# Altium PCB WirelessStepperMotorController.PcbDoc
Units mm, origin at the board's own origin, x right, y up, seen from the top; angles counter-clockwise.
Board outline 120 x 50 mm, 2 copper layers (Top Layer, Bottom Layer), stack 1.071 mm thick; 114 components, 82 nets, 373 pads, 223 vias.
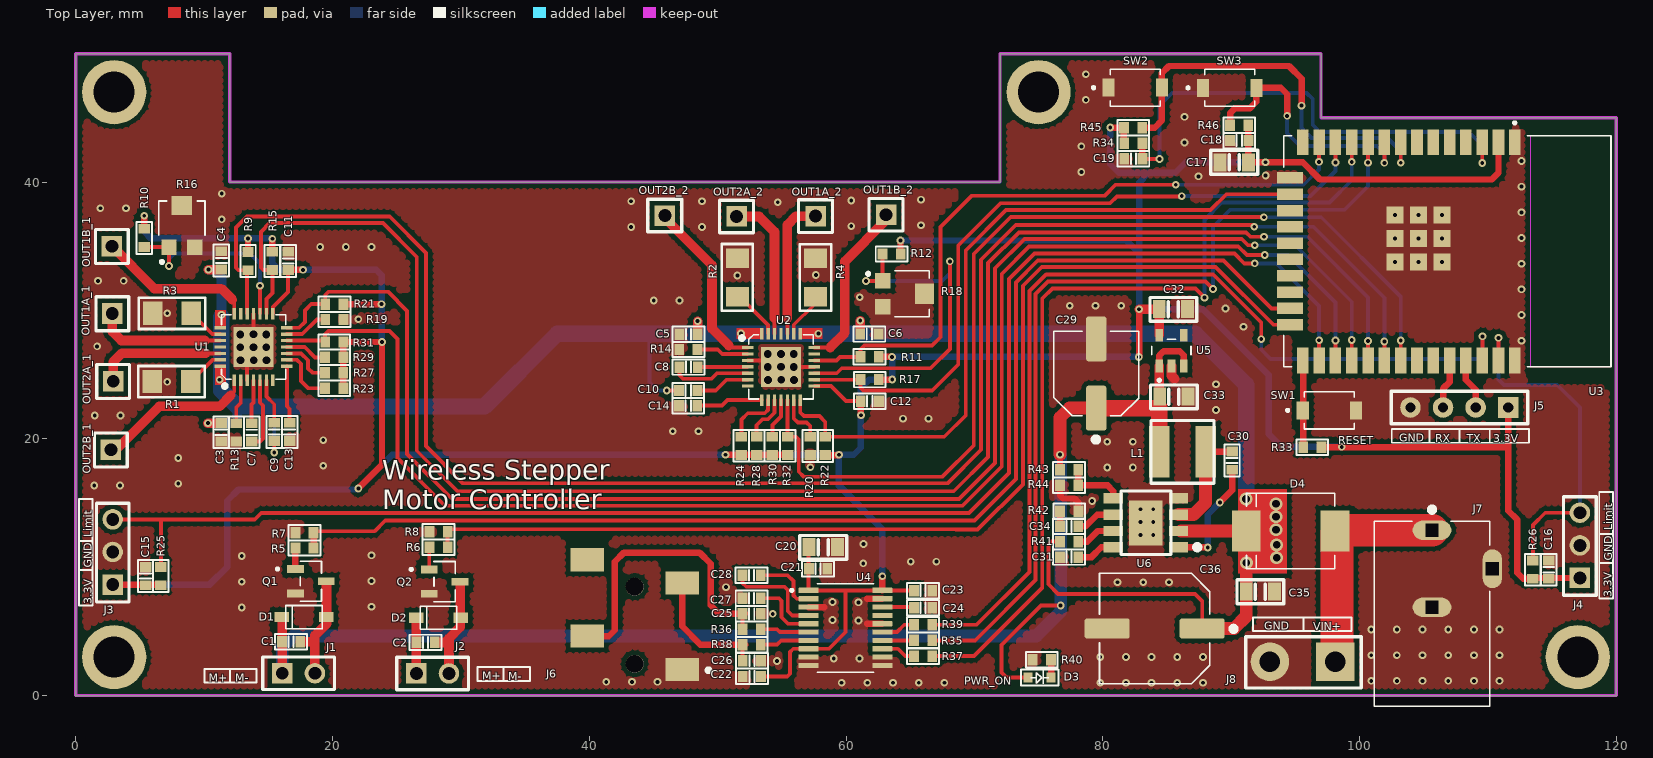
[diagram p0: Top Layer view]
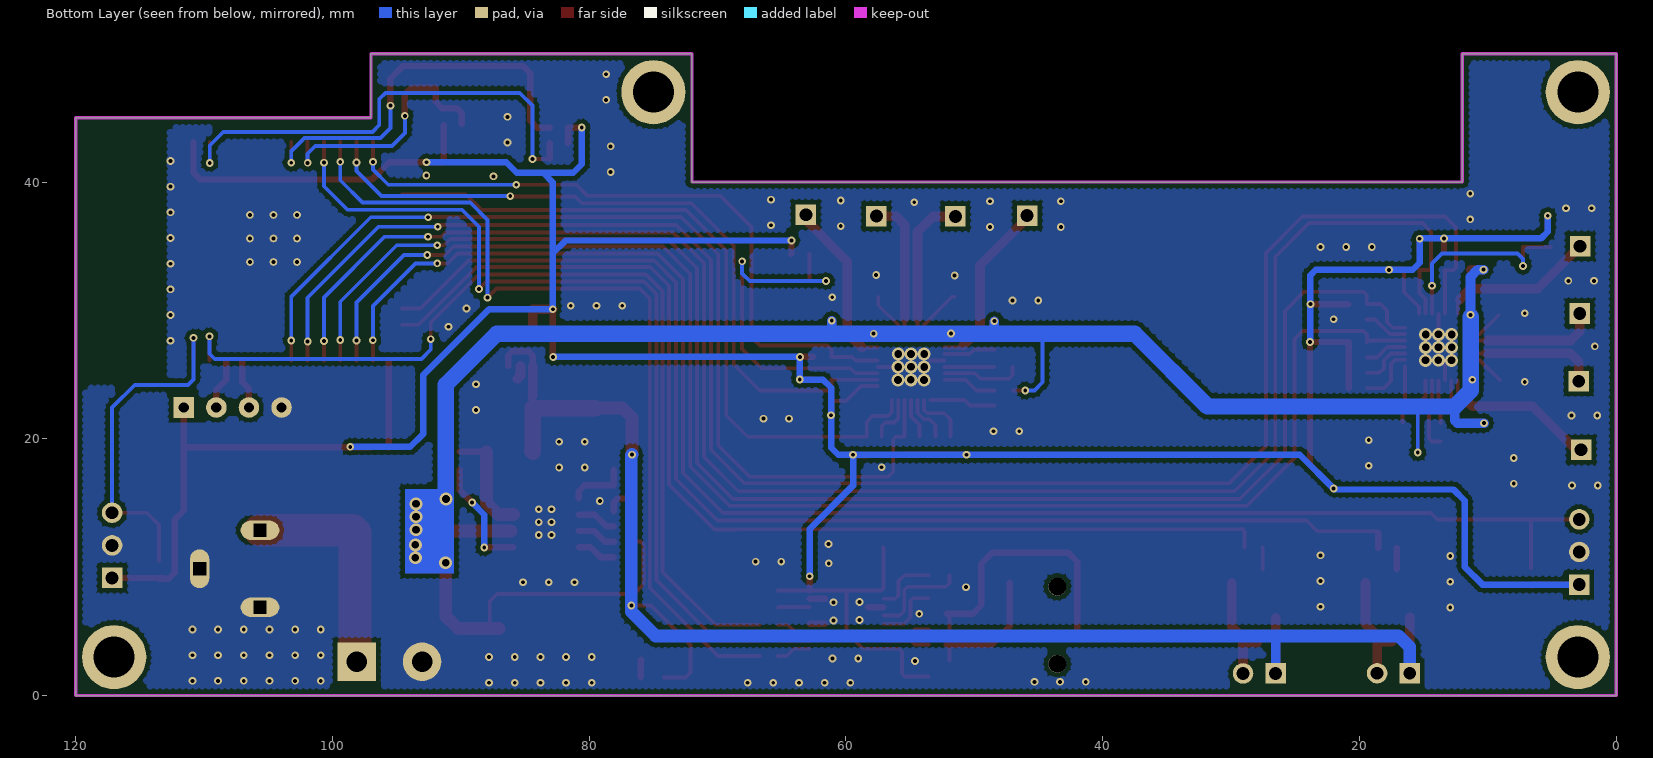
[diagram p1: Bottom Layer view, seen from below]

## Layer stack, top to bottom
Top Solder: solder mask 0.0102, Solder Resist, Dk 3.5
Top Layer: signal copper 0.0356
Dielectric 1: dielectric 1, FR-4, Dk 4.8
Bottom Layer: signal copper 0.0356
Bottom Solder: solder mask 0.0102, Solder Resist, Dk 3.5

## Board outline
0,0 0,50 12,50 12,40 72,40 72,50 97,50 97,45 120,45 120,0

## Design rules (kind name [scope] priority, off if disabled: settings)
Clearance [All] p1: gap=0.35 except(0.25: Arc-Arc Arc-Track Arc-SMDPad Arc-THPad Arc-Via Track-Track Track-SMDPad Track-THPad Track-Via SMDPad-SMDPad SMDPad-THPad SMDPad-Via THPad-THPad THPad-Via Via-Via)
Height [All] p1: minheight=0 maxheight=50 prefheight=12.7
HoleSize [All] p1: absolutevalues=TRUE maxlimit=10 minlimit=0.025 maxpercent=80.000 minpercent=20.000
HoleToHoleClearance [All] p1: gap=0 allowstackedmicrovias=TRUE
PolygonConnect PolygonConnect_1 [HasFootprint('RF_Shield_36903205S')] p1: connectstyle=Relief reliefconductorwidth=0.254 reliefentries=4 polygonreliefangle="90 Angle" airgapwidth=0.254
PolygonConnect [All] p2: connectstyle=Direct reliefconductorwidth=0.254 reliefentries=4 polygonreliefangle="90 Angle" airgapwidth=0.254
RoutingVias [All] p1: holewidth=0.3 width=0.6 viastyle="Through Hole" minholewidth=0.3 minwidth=0.5 maxholewidth=5 maxwidth=10
SolderMaskExpansion [All] p1: expansion=0.102
Width [All] p1: maxlimit=5 minlimit=0.2 preferedwidth=0.4
27 further rules are at their usual default settings.

## Components (designator, comment, footprint, x,y, rotation, side; value= is the part's Value field where it differs from the comment)
C1 "0.1uF" SMD_C(0603) 16.779,4.197 r0 top
C2 "0.1uF" SMD_C(0603) 27.26,4.14 r0 top
C3 "0.22uF" SMD_C(0603) 11.331,20.511 r90 top
C4 "0.22uF" SMD_C(0603) 11.355,33.89 r270 top
C5 "0.22uF" SMD_C(0603) 47.733,28.146 r0 top
C6 "0.22uF" SMD_C(0603) 61.816,28.161 r180 top
C7 "0.1uF" SMD_C(0603) 13.708,20.507 r270 top
C8 "0.1uF" SMD_C(0603) 47.743,25.589 r180 top
C9 "0.1uF" SMD_C(0603) 15.465,20.536 r270 top
C10 "0.1uF" SMD_C(0603) 47.714,23.764 r180 top
C11 "0.22uF" SMD_C(0603) 16.552,33.859 r270 top
C12 "0.22uF" SMD_C(0603) 61.853,22.92 r180 top
C13 "0.22uF" SMD_C(0603) 16.665,20.536 r90 top
C14 "0.22uF" SMD_C(0603) 47.711,22.585 r0 top
C15 "0.1uF" SMD_C(0603) 5.446,9.31 r90 top
C16 "0.1uF" SMD_C(0603) 114.733,9.805 r90 top
C17 "10uF" SMD_C(0805) 90.237,41.533 r0 top
C18 "0.1uF" SMD_C(0603) 90.628,43.232 r180 top
C19 "0.1uF" SMD_C(0603) 82.38,41.806 r180 top
C20 "10uF" SMD_C(0805) 58.227,11.559 r180 top
C21 "0.1uF" SMD_C(0603) 57.826,9.886 r0 top
C22 "0.1uF" SMD_C(0603) 52.677,1.49 r180 top
C23 "0.1uF" SMD_C(0603) 66.002,8.179 r0 top
C24 "0.1uF" SMD_C(0603) 66.006,6.852 r180 top
C25 "2.2nF" SMD_C(0603) 52.653,6.361 r0 top
C26 "2.2nF" SMD_C(0603) 52.674,2.721 r0 top
C27 "2.2uF" SMD_C(0603) 52.652,7.58 r180 top
C28 "2.2uF" SMD_C(0603) 52.65,9.368 r0 top
C29 "47uF/16V" CAPAE660X800N 79.489,25.085 r90 top
C30 "10nF" SMD_C(0603) 90.068,18.3 r90 top
C31 "0.1uF" SMD_C(0603) 77.375,10.792 r180 top
C32 "10uF" SMD_C(0805) 85.498,30.095 r180 top
C33 "10uF" SMD_C(0805) 85.538,23.28 r180 top
C34 "3.3nF" SMD_C(0603) 77.379,13.176 r180 top
C35 "10uF" SMD_C(0805) 92.278,8.096 r180 top
C36 "220uF/25V" CAPAE830X1000N 84.041,5.228 r180 top
D1 "1N5819HW-7-F" SOD-123 17.796,6.114 r0 top
D2 "1N5819HW-7-F" SOD-123 28.266,6.062 r0 top
D3 "SML-D12U1WT86" SMD_LED(0603) 75.074,1.417 r0 top
D4 "B540C-13-F" DO-214AB 94.628,12.824 r0 top
J1 "DC motor" Header-2.54m-2pin_1 16.09,1.738 r90 top
J2 "DC motor" Header-2.54m-2pin_1 26.538,1.726 r90 top
J3 "A1120LUA-T" Header-2.54m-3pin_1 2.887,8.647 r180 top
J4 "A1120LUA-T" Header-2.54m-3pin_1 117.156,9.162 r180 top
J5 "Debug" Header-2.54m-4pin 107.772,22.439 r270 top
J6 "SJ2-35813B-SMT-TR" CUI_SJ2-35813B-SMT-TR 43.54,5.731 r90 top locked
J7 "PJ-102A" CUI_PJ-102A 105.641,6.38 r270 top
J8 "2 Pin Connector" Header-2.54m-2pin_2 95.56,2.64 r270 top
L1 "10uH" IND_NRS5040 86.208,18.981 r180 top
OUT1A_1 "Terminal" Header-2.54m-1pin 2.857,29.76 r180 top
OUT1A_2 "Terminal" Header-2.54m-1pin 57.636,37.342 r90 top
OUT1B_1 "Terminal" Header-2.54m-1pin 2.824,35.001 r180 top
OUT1B_2 "Terminal" Header-2.54m-1pin 63.123,37.453 r90 top
OUT2A_1 "Terminal" Header-2.54m-1pin 2.924,24.486 r180 top
OUT2A_2 "Terminal" Header-2.54m-1pin 51.479,37.32 r90 top
OUT2B_1 "Terminal" Header-2.54m-1pin 2.742,19.142 r180 top
OUT2B_2 "Terminal" Header-2.54m-1pin 45.899,37.389 r90 top
Q1 "RQ5E040AJTCL" SC-96 18.318,8.906 r0 top
Q2 "RQ5E040AJTCL" SC-96 28.741,8.877 r0 top
R1 "0.11R" SMD_R(1206) 7.465,24.469 r180 top
R2 "0.11R" SMD_R(1206) 51.54,32.568 r90 top
R3 "0.11R" SMD_R(1206) 7.506,29.782 r180 top
R4 "0.11R" SMD_R(1206) 57.636,32.559 r90 top
R5 "150R" SMD_R(0603) 17.826,11.499 r180 top
R6 "150R" SMD_R(0603) 28.263,11.541 r180 top
R7 "10k" SMD_R(0603) 17.826,12.696 r180 top
R8 "10k" SMD_R(0603) 28.263,12.762 r180 top
R9 "10k" SMD_R(0603) 13.427,33.841 r90 top
R10 "10k" SMD_R(0603) 5.332,35.65 r90 top
R11 "10k" SMD_R(0603) 61.833,26.378 r0 top
R12 "10k" SMD_R(0603) 63.556,34.396 r0 top
R13 "10k" SMD_R(0603) 12.514,20.505 r90 top
R14 "10k" SMD_R(0603) 47.727,26.955 r0 top
R15 "10k" SMD_R(0603) 15.321,33.85 r90 top
R16 "10k" TRIM_TC33X-2-103E 8.275,36.721 r90 top
R17 "10k" SMD_R(0603) 61.846,24.617 r0 top
R18 "10k" TRIM_TC33X-2-103E 64.67,31.296 r0 top
R19 "10k" SMD_R(0603) 20.16,29.292 r180 top
R20 "10k" SMD_R(0603) 57.211,19.445 r90 top
R21 "10k" SMD_R(0603) 20.156,30.489 r0 top
R22 "10k" SMD_R(0603) 58.386,19.445 r270 top
R23 "10k" SMD_R(0603) 20.144,23.933 r0 top
R24 "10k" SMD_R(0603) 51.854,19.458 r270 top
R25 "10k" SMD_R(0603) 6.641,9.31 r90 top
R26 "10k" SMD_R(0603) 113.5,9.805 r90 top
R27 "10k" SMD_R(0603) 20.139,25.151 r0 top
R28 "10k" SMD_R(0603) 53.038,19.459 r270 top
R29 "10k" SMD_R(0603) 20.142,26.346 r0 top
R30 "10k" SMD_R(0603) 54.263,19.458 r270 top
R31 "10k" SMD_R(0603) 20.145,27.538 r0 top
R32 "10k" SMD_R(0603) 55.45,19.454 r270 top
R33 "10k" SMD_R(0603) 96.316,19.354 r0 top
R34 "10k" SMD_R(0603) 82.376,43.025 r0 top
R35 "22R" SMD_R(0603) 66.007,4.296 r180 top
R36 "470R" SMD_R(0603) 52.655,5.166 r180 top
R37 "22R" SMD_R(0603) 66.007,3.071 r180 top
R38 "470R" SMD_R(0603) 52.657,3.967 r180 top
R39 "22R" SMD_R(0603) 66.007,5.521 r180 top
R40 "470R" SMD_R(0603) 75.247,2.805 r0 top
R41 "100k" SMD_R(0603) 77.377,11.989 r180 top
R42 "13k" SMD_R(0603) 77.387,14.345 r0 top
R43 "57.6k" SMD_R(0603) 77.38,17.607 r0 top
R44 "13k" SMD_R(0603) 77.376,16.376 r180 top
R45 "10k" SMD_R(0603) 82.371,44.239 r180 top
R46 "10k" SMD_R(0603) 90.626,44.427 r0 top
SW1 "TL1015AF160QG" SW_TL1015AF160QG 97.646,22.22 r0 top
SW2 "TL1015AF160QG" SW_TL1015AF160QG 82.526,47.344 r0 top
SW3 "TL1015AF160QG" SW_TL1015AF160QG 89.887,47.338 r0 top
U1 "A4988SETTR-T" QFN28G_0.5-5X5MM 13.859,27.153 r90 top locked
U2 "A4988SETTR-T" QFN28G_0.5-5X5MM 54.935,25.604 r0 top locked
U3 "ESP32-WROOM-32D" MODULE_ESP32-WROOM-32D 106.831,34.605 r270 top locked
U4 "PCM5102APWR" TSSOP-20N 59.962,5.273 r0 top locked
U5 "AP2125K-3.3TRG1" SOT23-5 85.349,26.87 r0 top
U6 "AP3513EMPTR-G1" SOIC-8(EP) 83.362,13.458 r90 top

## Footprints (in the part's own frame and the unit in brackets; to place one, negate y for a bottom-side part, rotate by r counter-clockwise, add the part's x,y. Pads: shape width x height; smd on the part's side, far side on the other; paste and mask are expansions set on the pad)
CAPAE660X800N [mm] "CAPAE660X800N"
  rrect25% 3.51x1.58 smd: 1(-2.7,0) 2(2.7,0)
  silkscreen extent -5.34,-3.3 3.3,3.3, body extent -3.74,-3.42 3.66,3.38, height 6.1
CAPAE830X1000N [mm] "CAPAE660X800N"
  rrect25% 3.51x1.58 smd: 1(-3.7,0) 2(3.7,0)
  silkscreen extent -6.34,-4.3 4.3,4.3, body extent -4.45,-4.14 4.44,4.16, height 10.06
CUI_PJ-102A [mm]
  oval 1.508x3.016 hole 1 square: 1(-6.5,0) 2(-0.5,0)
  oval 3.016x1.508 hole 1 square: 3(-3.5,4.7)
  silkscreen extent -8.3,-4.5 7.2,4.5, body extent -7.23,-4.64 7.17,4.76, height 11.5
CUI_SJ2-35813B-SMT-TR [mm]
  rect 1.8x2.6 smd: 1(-3.7,-3.7) 2(3.05,-3.7) 3(-1.1,3.7) 10(4.85,3.7)
  round 1.4 hole 1.4 unplated: ""(-3.25,0) ""(2.75,0)
  silkscreen extent -3.9,-5.9 -3.6,-5.6, body extent -8.29,-4.5 5.71,4.5, height 5.11
DO-214AB [mm]
  rect 2.25x3.18 smd: A(3.455,0) K(-3.455,0)
  silkscreen extent -3.44,-2.95 3.44,2.95, body extent -3.98,-2.96 3.96,2.94, height 2.5
Header-2.54m-1pin [mm]
  rect 1.6x1.6 hole 1: 1(0,0)
  silkscreen extent -1.27,-1.31 1.27,1.34
Header-2.54m-2pin_1 [mm]
  rect 1.6x1.6 hole 1: 1(0,0)
  round 1.6 hole 1: 2(0,-2.54)
  silkscreen extent -1.27,-4.06 1.27,1.52
Header-2.54m-2pin_2 [mm]
  rect 3x3 hole 1.6: 1(0,2.54)
  round 3 hole 1.6: 2(0,-2.54)
  silkscreen extent -1.95,-4.43 2.05,4.57
Header-2.54m-3pin_1 [mm]
  rect 1.6x1.6 hole 1: 1(0,0)
  round 1.6 hole 1: 2(0,-2.54) 3(0,-5.08)
  silkscreen extent -1.27,-6.33 1.27,1.35
Header-2.54m-4pin [mm]
  rect 1.6x1.6 hole 0.8: 1(0,3.81)
  round 1.6 hole 0.8: 2(0,1.27) 3(0,-1.27) 4(0,-3.81)
  silkscreen extent -1.27,-5.31 1.27,5.33
IND_NRS5040 [mm] "IND_NR6045T100M"
  rect 1.6x4 smd: 1(-1.8,0) 2(1.8,0)
  silkscreen extent -2.45,-2.45 2.45,2.45
MODULE_ESP32-WROOM-32D [mm] "MODULE_ESP32-WROOM-32D"
  rect 2x0.9 smd: 1(-8.5,5.26) 2(-8.5,3.99) 3(-8.5,2.72) 4(-8.5,1.45) 5(-8.5,0.18) 6(-8.5,-1.09) 7(-8.5,-2.36) 8(-8.5,-3.63) 9(-8.5,-4.9) 10(-8.5,-6.17) 11(-8.5,-7.44) 12(-8.5,-8.71) 13(-8.5,-9.98) 14(-8.5,-11.25) 25(8.5,-11.25) 26(8.5,-9.98) 27(8.5,-8.71) 28(8.5,-7.44) 29(8.5,-6.17) 30(8.5,-4.9) 31(8.5,-3.63) 32(8.5,-2.36) 33(8.5,-1.09) 34(8.5,0.18) 35(8.5,1.45) 36(8.5,2.72) 37(8.5,3.99) 38(8.5,5.26)
  rect 0.9x2 smd: 15(-5.715,-12.25) 16(-4.445,-12.25) 17(-3.175,-12.25) 18(-1.905,-12.25) 19(-0.635,-12.25) 20(0.635,-12.25) 21(1.905,-12.25) 22(3.175,-12.25) 23(4.445,-12.25) 24(5.715,-12.25)
  rect 1.33x1.33 smd: 39(-2.835,-0.405) 39(-2.835,-2.24) 39(-2.835,-4.075) 39(-1,-0.405) 39(-1,-2.24) 39(-1,-4.075) 39(0.835,-0.405) 39(0.835,-2.24) 39(0.835,-4.075)
  round 0.6 hole 0.3: 39(-2.835,-0.405) 39(-2.835,-2.24) 39(-2.835,-4.075) 39(-1,-0.405) 39(-1,-2.24) 39(-1,-4.075) 39(0.835,-0.405) 39(0.835,-2.24) 39(0.835,-4.075)
  Top Layer keep-out region: -9,6.45 9,6.45 9,12.75 -9,12.75
  silkscreen extent -10.1,-12.75 9,12.75, body extent -8.98,-12.75 9.02,12.75, height 3.25
QFN28G_0.5-5X5MM [mm]
  rect 0.9x0.254 smd: 1(-2.59,1.5) 2(-2.59,1) 3(-2.59,0.5) 4(-2.59,0) 5(-2.59,-0.5) 6(-2.59,-1) 7(-2.59,-1.5) 15(2.59,-1.5) 16(2.59,-1) 17(2.59,-0.5) 18(2.59,0) 19(2.59,0.5) 20(2.59,1) 21(2.59,1.5)
  rect 0.254x0.9 smd: 8(-1.5,-2.59) 9(-1,-2.59) 10(-0.5,-2.59) 11(0,-2.59) 12(0.5,-2.59) 13(1,-2.59) 14(1.5,-2.59) 22(1.5,2.59) 23(1,2.59) 24(0.5,2.59) 25(0,2.59) 26(-0.5,2.59) 27(-1,2.59) 28(-1.5,2.59)
  rect 3.1x3.1 smd paste-3: 29(0,0)
  silkscreen extent -3.19,-2.5 2.5,2.5
SC-96 [mm]
  rect 1.31x0.6 smd: 1(-1.205,0.95) 2(-1.205,-0.95) 3(1.205,0)
  silkscreen extent -2.7,-1.57 0.83,1.57
SMD_C(0603) [mil]
  rect 30x35 smd mask+2: 1(-28,0) 2(28,0)
  silkscreen extent -49,-24 49,24, body extent -31,-16 31,16, height 31
SMD_C(0805) [mm]
  rect 1x1.4 smd: 1(-1.1,0) 2(1.1,0)
  silkscreen extent -1.82,-0.92 1.82,0.94, body extent -1.38,-0.58 1.32,0.61, height 0.6
SMD_LED(0603) [mm]
  rect 0.7x0.8 smd: 1(-0.9,0) 2(0.9,0)
  silkscreen extent -1.46,-0.62 1.46,0.62, body extent -0.98,-0.34 0.98,0.34, height 0.6
SMD_R(0603) [mil]
  rect 30x35 smd mask+2: 1(-28,0) 2(28,0)
  silkscreen extent -49,-24 49,24, body extent -35,-14 35,13, height 24
SMD_R(1206) [mm]
  rect 1.5x1.8 smd: 1(-1.5,0) 2(1.5,0)
  silkscreen extent -2.58,-1.2 2.6,1.23
SOD-123 [mm]
  rect 1.12x0.8 smd: A(1.73,0) K(-1.73,0)
  silkscreen extent -1.42,-0.9 1.42,0.9
SOIC-8(EP) [mm]
  rect 3.501x2.613 smd: 0(0,0)
  rect 0.802x1.505 smd: 1(-1.905,-2.54) 2(-0.635,-2.54) 3(0.635,-2.54) 4(1.905,-2.54) 5(1.905,2.54) 6(0.635,2.54) 7(-0.635,2.54) 8(-1.905,2.54)
  silkscreen extent -2.47,-4.19 2.47,1.95
SOT23-5 [mm]
  rect 0.59x1 smd: 1(-0.95,-1.2) 2(0,-1.2) 3(0.95,-1.2) 4(0.95,1.2) 5(-0.95,1.2)
  silkscreen extent -1.53,-2.41 1.53,0.87, body extent -1.45,-1.35 1.45,1.45, height 1.45
SW_TL1015AF160QG [mm]
  rect 0.95x1.4 smd: 1(-2.075,0) 2(2.075,0)
  silkscreen extent -3.35,-1.45 1.95,1.45, body extent -2.26,-1.44 2.24,1.46, height 2.1
TRIM_TC33X-2-103E [mm]
  rect 1.2x1.2 smd: 1(-1.8,1) 3(-1.8,-1)
  rect 1.5x1.6 smd: 2(1.45,0)
  silkscreen extent -3.07,-1.8 1.8,1.8, body extent -1.9,-1.5 1.9,1.5, height 1.1
TSSOP-20N [mm]
  rrect25% 1.57x0.41 smd: 1(-2.87,2.925) 2(-2.87,2.275) 3(-2.87,1.625) 4(-2.87,0.975) 5(-2.87,0.325) 6(-2.87,-0.325) 7(-2.87,-0.975) 8(-2.87,-1.625) 9(-2.87,-2.275) 10(-2.87,-2.925) 11(2.87,-2.925) 12(2.87,-2.275) 13(2.87,-1.625) 14(2.87,-0.975) 15(2.87,-0.325) 16(2.87,0.325) 17(2.87,0.975) 18(2.87,1.625) 19(2.87,2.275) 20(2.87,2.925)
  silkscreen extent -4.29,-3.45 2.2,3.45, body extent -3.21,-3.25 3.19,3.25, height 1.2

## Part data
C1 C2 C7 C8 C9 C10 C15 C16 C18 C19 C21 C22 C23 C24 C31: library part Cap, "0.1µF ±10% 25V"
C3 C4 C5 C6 C11 C12 C13 C14: library part Cap, "0.22µF ±10% 25V"
C17 C20 C32 C33 C35: library part Cap, "10µF ±10% 25V"
C25 C26: library part Cap, "2200pF ±10% 25V"
C27 C28: library part Cap, "2.2µF ±10% 25V"
C29: library part "Cap Pol1", "CAP ALUM 47UF 20% 16V SMD"
C30: library part Cap, "10nF ±10% 50V"
C34: library part Cap, "3300pF ±10% 25V"
C36: library part "Cap Pol1", "CAP ALUM 220UF 20% 25V SMD"
D1 D2: library part "Diode 10TQ035", "DIODE SCHOTTKY 40V 1A SOD123"
D3: library part LED1, "Typical RED GaAs LED"
D4: library part "Diode 10TQ035", "DIODE SCHOTTKY 40V 5A SMC"
J3 J4: library part 3PinConnector, "MAGNETIC SWITCH UNIPOLAR 3SIP"
J5: library part 4PinConnector, "4PinConnector"
J6: "AUDIO JACK, 3.5 MM, RT, 3 CONDUC"
J7: "CONN PWR JACK 2X5.5MM SOLDER"
J8: library part 2PinConnector
L1: library part Inductor, "FIXED IND 10UH 2.1A 72.8 MOHM"
Q1 Q2: library part MOSFET-N, "MOSFET N-CH 30V 4A TSMT3"
R1 R2 R3 R4: library part "Res Semi", "110 mOhms ±1% 0.25W"
R5 R6: library part "Res Semi", "150 Ohms ±1% 0.1W"
R7 R8 R9 R10 R11 R12 R13 R14 R15 R17 R19 R20 R21 R22 R23 R24 R25 R26 R27 R28 R29 R30 R31 R32 R33 R34 R41 R45 R46: library part "Res Semi", "10 kOhms ±1% 0.1W"
R16 R18: library part RPot, "Potentiometer"
R35 R37 R39: library part "Res Semi", "22 Ohms ±1% 0.1W"
R36 R38 R40: library part "Res Semi", "470 Ohms ±1% 0.1W"
R42: library part "Res Semi", "13 kOhms ±1% 0.1W"
R43: library part "Res Semi", "93.1kOhms ±1% 0.1W"
R44: library part "Res Semi", "13kOhms ±1% 0.1W"
SW1 SW2 SW3: library part SW-PB, "SWITCH TACTILE SPST-NO 0.05A 12V"
U1 U2: library part DRIVER-A4988SETTR-T(QFN28), "Bipolar Motor Driver DMOS Logic 28-QFN _5x5_"
U3: "Bluetooth, WiFi 802.11b/g/n, Bluetooth v4.2 + EDR, Class 1, 2 and 3 Transceiver Module 2.4GHz ~ 2.5GHz Integrated, Trace Surface Mount"
U4: "2VRMS DirectPath, 112dB Audio Stereo DAC with 32-bit, 384kHz PCM Interface 20-TSSOP -25 to 85"
U5: library part AP2125K-2.8TRG1, "IC REG LINEAR 2.8V 300MA SOT23-5"
U6: "IC REG BUCK ADJUSTABLE 3A 8SO"

## Free pads (board coordinates)
  round 5 hole 3.2: 0(3,3) 0(3,47) 0(75,47) 0(117,3)

## Via types
v1: diameter 0.6, hole 0.3, Top Layer to Bottom Layer, 198 vias
v2: diameter 1, hole 0.6, Top Layer to Bottom Layer, 25 vias

## Nets (pads, with @x,y where several pads share a name; then routed paths per layer and width w, separated by ;. In a path a pad name is that pad's centre, name@x,y a point inside that pad or via, vN(x,y) a via of type N, cw(c..) or ccw(c..) an arc to the next point about the centre after c; other vN are vias at no path point)
3.3V: C11.2 C12.2 C15.1 C16.1 C17.2 C18.1 C20.2 C21.1 C22.1 C23.1 C32.2 J3.1 J4.1 J5.1 R9.2 R10.2 R11.2 R12.2 R15.2 R17.2 R21.2 R22.2 R23.2 R24.2 R25.1 R26.1 R27.2 R28.2 R29.2 R30.2 R31.2 R32.2 R33.2 R34.1 R45.2 R46.2 U1.15 U2.15 U3.2 U4.1 U4.8 U4.20 U5.5 | length 341.4
  Top Layer w0.3: U1.15 15.359,30.255 16.552,31.448 C11.2 ; C22.1@53.588,1.49 55.428,1.49 55.644,1.707 55.644,3.404 55.889,3.648 U4.8 58.685,3.648 59.969,4.931 59.969,8.198 ; C20.2 57.092,11.524 57.092,8.351 57.245,8.198 59.969,8.198 ; U2.15 58.831,24.104 59.987,22.948 C12.2@60.987,22.948 ; C23.1 65.272,8.198 U4.20 59.969,8.198
  Top Layer w0.5: J3.1 6.507,8.647 R25.1@6.563,8.59 ; R10.2 5.347,36.376 v1(5.347,37.372) ; R9.2 v1(13.427,35.606) ; R15.2 v1(15.321,35.578) ; C11.2 16.563,33.159 v1(17.709,33.159) ; R23.2 20.856,23.935 R31.2 v1(23.862,27.538) 23.862,17.973 v1(22.02,16.131) ; R21.2 v1(23.827,30.489) ; v1(50.62,18.756) 50.633,18.743 R32.2 ; R22.2 59.43,18.734 v1(59.451,18.756) ; C12.2 61.164,22.898 v1(61.164,21.84) ; R11.2 v1(63.588,26.378) ; R17.2 v1(63.598,24.617) ; U4.20 v1(62.832,9.301) ; v1(64.244,35.447) 64.244,34.419 R12.2 ; v1(80.579,44.239) R45.2 ; R45.2@81.631,44.154 81.631,43.059 R34.1 ; v1(82.809,26.378) 82.831,26.4 v1(82.831,30.095) ; C32.2 C32.2@84.399,30.093 ; R46.2 91.339,44.425 C18.1 91.339,41.535 95.582,41.535 96.921,40.196 110.284,40.196 110.821,40.733 U3.2 ; R33.2 111.525,19.354 ; J5.1 111.582,14.406 112.277,13.711 112.277,9.558 112.741,9.093 R26.1 R26.1@113.568,9.162 ; R26.1@113.136,9.162 R26.1@113.568,9.162 ; J4.1 R26.1@113.568,9.162
  Top Layer w0.75: v1(82.831,30.095) C32.2 ; U5.5 C32.2@84.399,30.093
  Bottom Layer w0.5: J3.1 10.431,8.647 11.802,10.018 11.802,15.167 12.691,16.055 21.96,16.055 24.66,18.756 v1(50.62,18.756) v1(59.451,18.756) ; v1(5.347,37.372) 5.347,36.128 5.869,35.606 v1(13.427,35.606) 15.293,35.606 v1(15.321,35.578) 15.321,33.704 15.866,33.159 v1(17.709,33.159) 23.406,33.159 23.827,32.738 v1(23.827,30.489) 23.827,27.573 v1(23.862,27.538) ; v1(62.832,9.301) 62.832,12.976 59.451,16.357 v1(59.451,18.756) ; v1(64.244,35.447) 81.828,35.447 82.831,34.444 ; v1(80.579,44.239) 80.579,41.39 81.243,40.726 83.59,40.726 ; v1(82.809,26.378) v1(63.588,26.378) 63.598,26.368 v1(63.598,24.617) 61.8,24.617 61.155,23.971 61.155,19.306 60.605,18.756 v1(59.451,18.756) ; v1(92.671,41.543) 86.459,41.543 85.642,40.726 83.59,40.726 ; v1(98.606,19.371) 93.932,19.371 92.927,20.376 92.927,24.968 87.8,30.095 v1(82.831,30.095) 82.831,34.444 ; 82.831,34.444 82.831,39.967 83.59,40.726
5V: C1.1 C2.1 C29.1 C33.2 D1.K D2.K D3.1 J1.1 J2.1 L1.2 R43.1 U5.1 U5.3 | length 119.8
  Top Layer w0.3: D3.1 72.499,1.417 72.11,1.806 72.11,3.939 75.195,7.024 v1(76.72,7.024)
  Top Layer w0.5: R43.1 v1@76.668,18.767 ; U5.1 84.399,26.486 84.734,26.821 85.982,26.821 86.299,26.503 U5.3
  Top Layer w0.75: D1.K 16.09,6.089 J1.1 ; D2.K 26.538,6.06 J2.1 ; U5.1 84.399,23.319 C33.2
  Top Layer w1: v1(76.672,18.767) 76.672,21.66 77.402,22.389 C29.1@79.489,22.389
  Top Layer w1.27: C29.1@79.489,22.389 84.357,22.389 84.408,22.44 L1.2 L1.2@84.449,19.021
  Bottom Layer w0.75: 26.46,4.652 26.538,4.575 J2.1
  Bottom Layer w1: J1.1 16.09,3.787 16.956,4.652 26.46,4.652 74.826,4.652 76.72,6.546 v1(76.72,7.024) 76.72,18.719 v1(76.672,18.767)
BUTTON1: R45.1 SW2.2 U3.8 | length 31.8
  Top Layer w0.3: v1(103.201,41.497) U3.8
  Top Layer w0.5: R45.1 84.045,44.239 84.601,44.795 SW2.2 84.601,48.473 85.162,49.034 94.503,49.034 95.484,48.053 v1(95.484,45.951)
  Bottom Layer w0.3: v1(95.484,45.951) 95.484,44.211 96.256,43.44 102.185,43.44 103.201,42.423 v1(103.201,41.497)
BUTTON2: R46.1 SW3.2 U3.9 | length 20.6
  Top Layer w0.3: v1(101.931,41.492) U3.9
  Top Layer w0.5: R46.1@89.924,44.489 89.924,45.376 90.28,45.732 91.452,45.732 91.962,46.242 SW3.2 93.863,47.338 94.357,46.844 v1(94.357,45.156)
  Bottom Layer w0.3: v1(94.357,45.156) 94.357,43.816 95.371,42.802 101.336,42.802 101.931,42.207 v1(101.931,41.492)
DC_MOTOR_1: R5.1 R7.1 U3.23 | length 96.5
  Top Layer w0.3: R7.1@18.555,12.795 23.263,12.795 24.111,13.643 70.006,13.643 73.236,16.873 73.236,32.189 74.935,33.888 89.404,33.888 93.132,30.16 U3.23
  Top Layer w0.5: R5.1 R7.1
DC_MOTOR_2: R6.1 R8.1 U3.24 | length 86.1
  Top Layer w0.3: R6.1 R8.1 ; R8.1@29.078,12.982 68.552,12.925 70.255,12.925 73.782,16.452 73.782,31.926 75.245,33.389 88.774,33.389 93.273,28.89 U3.24
DIR_1: R9.1 U1.19 U3.30 | length 138.9
  Top Layer w0.3: U1.19 13.359,33.061 R9.1 12.677,33.13 12.482,33.324 12.482,36.453 13.333,37.304 24.461,37.304 27.281,34.484 27.281,19.431 30.179,16.534 67.894,16.534 70.509,19.148 70.509,33.947 73.219,36.656 v1@91.744,36.656 ; U3.30 v1(101.931,27.575)
  Bottom Layer w0.3: v1(91.801,36.518) 96.403,36.518 101.931,30.99 v1(101.931,27.575)
DIR_2: R11.1 U2.19 U3.13 | length 52.9
  Top Layer w0.3: U2.19 59.263,26.104 59.537,26.378 R11.1 61.122,26.957 61.43,27.264 66.706,27.264 67.352,27.91 67.352,36.507 69.771,38.926 80.14,38.926 81.001,39.787 v1(85.679,39.787) ; v1@96.851,41.679 U3.13
  Bottom Layer w0.3: v1(85.679,39.787) 95.656,39.787 96.839,40.969 v1(96.839,41.568)
ENABLE_1: R13.2 U1.2 | length 3.5
  Top Layer w0.3: R13.2@12.535,21.237 R13.2 12.514,22.432 12.859,22.776 U1.2
ENABLE_2: R14.2 U2.2 | length 4.1
  Top Layer w0.3: R14.2 50.007,26.955 50.357,26.604 U2.2
GND: C3.1 C4.1 C5.1 C6.1 C11.1 C12.1 C13.1 C14.1 C15.2 C16.2 C17.1 C18.2 C19.2 C20.1 C21.2 C22.2 C23.2 C24.1 C25.2 C26.2 C27.2 C29.2 C31.2 C32.1 C33.1 C35.1 C36.2 J3.2 J4.2 J5.4 J6.1 J7.2 J7.3 J8.2 Q1.2 Q2.2 R1.2 R2.2 R3.2 R4.2 R7.2 R8.2 R13.1 R14.1 R16.2 R16.3 R18.2 R18.3 R19.1 R20.1 R40.1 R42.2 R44.2 SW1.2 SW2.1 SW3.1 U1.3 U1.18 U1.29 U2.3 U2.18 U2.29 U3.1 U3.15 U3.38 U3.39 U4.3 U4.9 U4.10 U4.11 U4.12 U4.16 U4.19 U5.2 U6.0 U6.4 | length 12.9
  Top Layer w0.3: U1.3 U1.29@13.359,25.818 ; U1.29@13.859,28.134 U1.18 ; U2.3 U2.29@53.457,26.104 ; U2.29@56.368,25.604 U2.18
  Top Layer w0.5: U4.3 58.29,6.898 ; 61.637,5.598 U4.16 ; 61.639,7.548 U4.19 ; R44.2 76.665,15.61 76.921,15.354 77.792,15.354 78.098,15.048 R42.2
  Top Layer w0.75: U5.2 85.349,24.921 85.588,24.682
  other v1: 59.662,1.005 61.662,1.005 63.662,1.005 65.662,1.005 67.662,1.005 79.801,1.005 81.801,1.005 83.801,1.005 85.801,1.005 87.801,1.005 41.326,1.069 43.326,1.069 45.326,1.069 100.904,1.148 102.904,1.148 104.904,1.148 106.904,1.148 108.904,1.148 110.904,1.148 54.631,2.699 59.046,2.887 61.046,2.887 79.801,3.006 81.801,3.006 83.801,3.006 85.801,3.006 87.801,3.006 100.904,3.148 102.904,3.148 104.904,3.148 106.904,3.148 108.904,3.148 110.904,3.148 100.904,5.148 102.904,5.148 104.904,5.148 106.904,5.148 108.904,5.148 110.904,5.148 60.974,5.848 58.946,5.882 54.298,6.366 12.94,6.866 23.049,6.924 60.972,7.262 58.945,7.297 50.649,8.449 81.149,8.831 83.149,8.831 85.149,8.831 12.94,8.866 23.049,8.924 61.345,10.299 65.039,10.433 67.039,10.433 12.94,10.866 23.049,10.924 61.359,11.815 82.932,12.512 83.932,12.512 82.932,13.512 83.932,13.512 82.932,14.512 83.932,14.512 79.169,15.149 1.45,16.359 3.45,16.359 7.99,16.509 57.224,17.789 80.343,17.772 82.343,17.772 19.282,17.898 7.99,18.509 80.343,19.772 82.343,19.772 19.282,19.898 46.505,20.593 48.505,20.593 64.432,21.574 66.432,21.574 1.492,21.811 3.492,21.811 88.819,22.246 88.819,24.246 7.131,24.438 1.673,27.2 112.611,27.64 90.966,28.733 22.021,29.313 112.611,29.64 7.131,29.776 89.552,30.147 77.432,30.369 79.432,30.369 81.432,30.369 45.026,30.768 47.026,30.768 61.074,31.028 112.611,31.64 1.739,32.303 3.739,32.303 51.541,32.719 57.652,32.761 112.611,33.64 19.045,34.94 21.045,34.94 23.045,34.94 112.611,35.64 43.267,36.501 48.791,36.498 60.412,36.565 65.837,36.629 11.376,37.094 112.611,37.64 1.925,37.962 3.925,37.962 54.685,38.425 43.267,38.501 48.791,38.498 60.412,38.565 65.837,38.629 11.376,39.094 112.611,39.64 87.454,40.443 92.682,40.515 78.333,40.777 112.611,41.64 78.333,42.777 86.364,43.074 86.364,45.074 78.683,46.397 78.683,48.397
  other v2: 53.926,24.582 54.947,24.592 55.949,24.582 53.914,25.594 54.935,25.604 55.937,25.595 12.842,26.108 13.863,26.118 14.865,26.108 53.914,26.598 54.935,26.608 55.937,26.599 12.83,27.121 13.851,27.131 14.853,27.121 12.83,28.124 14.853,28.125 13.851,28.134
HALL_LIMIT_1: J3.3 R25.2 U3.26 | length 121.1
  Top Layer w0.3: J3.3 6.647,13.727 ; R25.2@6.653,9.923 6.653,13.722 6.647,13.727 ; v1(91.839,33.665) 91.017,33.665 90.246,34.435 74.691,34.435 72.691,32.435 72.691,17.328 69.594,14.231 14.453,14.231 13.949,13.727 6.647,13.727 ; U3.26 v1(96.851,27.683)
  Bottom Layer w0.3: v1(91.839,33.665) 93.52,33.665 96.851,30.333 v1(96.851,27.683)
HALL_LIMIT_2: J4.3 R26.2 U3.37 | length 27.3
  Top Layer w0.3: U3.37 v1(110.821,27.863) ; R26.2 113.5,13.283 114.459,14.242 J4.3
  Bottom Layer w0.3: v1(110.821,27.863) 110.821,24.627 111.246,24.202 115.4,24.202 117.156,22.446 J4.3
I2S_BCK: R37.1 U3.11 | length 68.3
  Top Layer w0.3: R37.1 69.974,3.071 75.28,8.377 75.28,30.907 76.088,31.715 87.223,31.715 v1@87.931,31.007 ; v1(99.391,41.573) U3.11
  Bottom Layer w0.3: v1(87.92,30.997) 87.92,37.052 89.268,38.4 97.653,38.4 99.391,40.139 v1(99.391,41.573)
I2S_DATA: R35.1 U3.10 | length 68.4
  Top Layer w0.3: R35.1 70.066,4.296 74.769,8.999 74.769,31.293 75.722,32.246 88.001,32.246 v1(88.584,31.663) ; v1(100.661,41.512) U3.10
  Bottom Layer w0.3: v1(88.584,31.663) 88.584,36.516 89.905,37.837 98.829,37.837 100.661,39.669 v1(100.661,41.512)
I2S_LRCK: R39.1 U3.36 | length 74.3
  Top Layer w0.3: R39.1 70.172,5.521 74.285,9.633 74.285,31.503 75.591,32.809 88.6,32.809 92.339,29.071 v1(92.339,27.762) ; U3.36 109.567,26.121 v1(109.567,27.982)
  Bottom Layer w0.3: v1(92.339,27.762) 92.339,26.963 93.074,26.228 109.169,26.228 109.567,26.626 v1(109.567,27.982)
MS1_1: R23.1 U1.9 | length 4.7
  Top Layer w0.3: U1.9 17.24,26.153 17.55,25.843 17.55,24.507 18.123,23.933 R23.1
MS1_2: R24.1 U2.9 | length 4.5
  Top Layer w0.3: R24.1 51.854,21.497 52.345,21.988 53.67,21.988 53.935,22.253 U2.9
MS2_1: R27.1 U1.10 | length 4
  Top Layer w0.3: U1.10 17.567,26.653 18.097,26.123 18.097,25.49 18.436,25.151 R27.1
MS2_2: R28.1 U2.10 | length 3.7
  Top Layer w0.3: R28.1 53.038,21.059 53.506,21.527 53.929,21.527 54.435,22.033 U2.10
MS3_1: R29.1 U1.11 | length 3.3
  Top Layer w0.3: U1.11 17.848,27.153 18.654,26.346 R29.1
MS3_2: R30.1 U2.11 | length 3.1
  Top Layer w0.3: R30.1 54.263,21.074 54.935,21.746 U2.11
MUTE: U4.17
NetC1_2: C1.2 D1.A J1.2 Q1.3 | length 8.6
  Top Layer w0.75: C1.2 18.601,4.197 18.63,4.167 ; J1.2 18.63,4.167 ; Q1.3@19.541,8.771 19.541,5.59 18.63,4.68 18.63,4.167
NetC2_2: C2.2 D2.A J2.2 Q2.3 | length 8.6
  Top Layer w0.75: C2.2 28.759,4.14 29.078,4.459 ; J2.2 29.078,4.459 ; Q2.3@29.95,8.769 29.95,5.331 29.078,4.459
NetC7_1: C7.1 U1.4 | length 3.4
  Top Layer w0.3: C7.1 13.708,22.667 13.859,22.818 U1.4
NetC7_2: C7.2 U1.5 | length 5.6
  Top Layer w0.3: C7.2 14.352,19.796 14.587,20.031 14.587,22.581 14.359,22.809 U1.5
NetC8_1: C8.1 U2.4 | length 3.9
  Top Layer w0.3: C8.1 48.469,25.604 U2.4
NetC8_2: C8.2 U2.5 | length 6.2
  Top Layer w0.3: C8.2 47.031,24.957 47.307,24.681 49.532,24.681 49.955,25.104 U2.5
NetC9_1: C9.1 U1.6 | length 3.6
  Top Layer w0.3: U1.6 14.859,23.293 15.465,22.688 C9.1
NetC10_1: C10.1 U2.6 | length 4.3
  Top Layer w0.3: C10.1 49.855,23.764 50.696,24.604 U2.6
NetC13_2: C13.2 U1.8 | length 4.5
  Top Layer w0.3: U1.8 16.449,22.55 16.665,22.333 C13.2
NetC14_2: C14.2 U2.8 | length 5.2
  Top Layer w0.3: C14.2 50.351,22.585 50.78,23.014 U2.8
NetC19_1: C19.1 R34.2 U3.3 | length 38.1
  Top Layer w0.3: C19.1@83.087,41.81 C19.1 83.104,41.793 v1(84.424,41.793) ; v1(109.551,41.488) U3.3
  Top Layer w0.5: C19.1@83.087,41.81 R34.2
  Bottom Layer w0.3: v1(84.424,41.793) 84.424,45.951 85.412,46.939 95.869,46.939 96.355,46.453 96.355,44.428 96.878,43.906 108.504,43.906 109.551,42.858 v1(109.551,41.488)
NetC24_2: C24.2 U4.18 | length 2.5
  Top Layer w0.3: U4.18 65.248,6.898 C24.2
NetC25_1: C25.1 J6.3 R36.2 | length 23.2
  Top Layer w0.3: C25.1 51.942,5.168 R36.2
  Top Layer w0.5: J6.3 41.53,4.631 41.993,5.094 41.993,10.424 42.711,11.142 48.584,11.142 49.461,10.264 49.461,7.04 50.14,6.361 C25.1 C25.1@52.142,6.361
NetC26_1: C26.1 J6.2 R38.2 | length 10.1
  Top Layer w0.3: R38.2 51.946,2.738 C26.1
  Top Layer w0.5: J6.2 47.24,5.39 48.663,3.967 R38.2 R38.2@52.146,3.967
NetC27_1: C27.1 U4.5 | length 5.1
  Top Layer w0.3: C27.1@53.563,7.58 54.773,7.58 54.983,7.371 54.983,6.101 55.486,5.598 U4.5
NetC28_1: C28.1 U4.4 | length 7.7
  Top Layer w0.3: C28.1 51.939,8.771 52.232,8.478 55.205,8.478 55.46,8.222 55.46,6.598 55.81,6.248 U4.4
NetC28_2: C28.2 U4.2 | length 4.9
  Top Layer w0.3: C28.2@53.561,9.368 55.458,9.368 55.905,8.922 55.905,7.803 56.16,7.548 U4.2
NetC30_1: C30.1 U6.1 | length 9.1
  Top Layer w0.5: U6.1 85.916,11.54 v1(88.18,11.54) ; v1(89.118,15.036) 90.068,15.985 C30.1
  Bottom Layer w0.5: v1(88.18,11.54) 88.18,14.098 v1(89.118,15.036)
NetC30_2: C30.2 L1.1 U6.3 | length 8.5
  Top Layer w0.5: L1.1 90.037,18.981 C30.2
  Top Layer w1: U6.3 87.075,14.093 88.008,15.026 L1.1
NetC31_1: C31.1 U6.8 | length 3.1
  Top Layer w0.5: C31.1 79.125,10.792 79.891,11.558 80.818,11.558 U6.8
NetC34_1: C34.1 U6.6 | length 3.1
  Top Layer w0.5: C34.1 78.64,13.176 79.557,14.093 U6.6
NetC34_2: C34.2 R42.1 | length 1.2
  Top Layer w0.5: C34.2 76.676,13.184 R42.1
NetD3_2: D3.2 R40.2 | length 1.4
  Top Layer w0.5: R40.2 75.974,2.788 D3.2
NetD4_A: D4.A J7.1 J8.1 | length 17.6
  Top Layer w2.54: J8.1 98.24,2.78 98.24,12.694 98.429,12.883 J7.1@105.641,12.883
NetJ5_2: J5.2 U3.35 | length 4
  Top Layer w0.5: U3.35 108.281,24.594 109.042,23.833 J5.2
NetJ5_3: J5.3 U3.34 | length 3.9
  Top Layer w0.5: J5.3 106.502,23.913 107.011,24.423 U3.34
NetQ1_1: Q1.1 R5.2 | length 1.6
  Top Layer w0.5: Q1.1 17.113,11.497 R5.2
NetQ2_1: Q2.1 R6.2 | length 1.7
  Top Layer w0.3: Q2.1 27.536,11.525 R6.2
NetR1_1: R1.1 U1.27 | length 2.9
  Top Layer w0.3: R1.1@9.062,24.566 10.649,26.153 U1.27
NetR2_1: R2.1 U2.27 | length 4
  Top Layer w0.3: R2.1 51.743,31.068 53.935,28.876 U2.27
NetR3_1: R3.1 U1.23 | length 2.7
  Top Layer w0.3: R3.1@9.166,29.622 10.636,28.153 U1.23
NetR4_1: R4.1 U2.23 | length 3.5
  Top Layer w0.254: U2.23 55.935,28.875 57.479,30.419 R4.1@57.479,31.069
NetR10_1: R10.1 R16.1 U1.17 | length 15.6
  Top Layer w0.3: R10.1@5.137,34.938 7.258,34.938 R16.1 v1(7.275,33.463) ; U1.17 v1(14.359,31.918)
  Bottom Layer w0.3: v1(7.275,33.463) 7.275,34.006 7.697,34.427 13.573,34.427 14.359,33.642 v1(14.359,31.918)
NetR12_1: R12.1 R18.1 U2.17 | length 29.3
  Top Layer w0.3: U2.17 59.279,25.104 59.671,25.497 66.58,25.497 68.09,27.007 v1(68.09,33.823) ; v1(61.552,32.297) R18.1@62.868,32.297 ; R12.1 62.845,32.321 R18.1@62.868,32.297 ; R18.1 R18.1@62.868,32.297
  Bottom Layer w0.3: v1(61.552,32.297) 67.499,32.297 68.09,32.889 v1(68.09,33.823)
NetR19_2: R19.2 U1.13 | length 3.5
  Top Layer w0.3: U1.13 17.654,28.153 18.793,29.292 R19.2
NetR20_2: R20.2 U2.13 | length 3.8
  Top Layer w0.3: U2.13 55.935,21.587 56.248,21.275 56.928,21.275 57.211,20.993 R20.2
NetR33_1: R33.1 SW1.1 U3.25 | length 6.8
  Top Layer w0.5: U3.25 95.605,26.081 R33.1
NetR35_2: R35.2 U4.14 | length 2.5
  Top Layer w0.3: U4.14 65.293,4.298 R35.2
NetR36_1: R36.1 U4.6 | length 3.6
  Top Layer w0.3: R36.1@53.567,5.166 54.63,5.166 54.848,4.948 U4.6
NetR37_2: R37.2 U4.13 | length 2.7
  Top Layer w0.3: U4.13 64.036,3.648 64.613,3.071 R37.2
NetR38_1: R38.1 U4.7 | length 3.7
  Top Layer w0.3: R38.1@53.568,3.967 54.628,3.967 54.958,4.298 U4.7
NetR39_2: R39.2 U4.15 | length 2.7
  Top Layer w0.3: U4.15 63.959,4.948 64.532,5.521 R39.2
NetR41_1: R41.1 U6.7 | length 3.1
  Top Layer w0.5: R41.1@78.037,11.999 78.791,11.999 79.615,12.823 U6.7
NetR43_2: R43.2 R44.1 U6.5 | length 4.7
  Top Layer w0.5: R43.2 78.091,16.38 R44.1 80.373,16.376 80.822,15.926 U6.5
OUT1A_1: OUT1A_1.1 U1.24 | length 10.1
  Top Layer w0.3: 10.053,27.653 U1.24
  Top Layer w0.75: OUT1A_1.1 2.857,28.36 3.564,27.653 10.053,27.653
OUT1A_2: OUT1A_2.1 U2.24 | length 11
  Top Layer w0.3: U2.24 55.435,29.413
  Top Layer w0.75: 55.435,29.413 55.435,36.668 56.109,37.342 OUT1A_2.1
OUT1B_1: OUT1B_1.1 U1.21 | length 12.3
  Top Layer w0.3: 12.209,30.839 12.359,30.69 U1.21
  Top Layer w0.75: OUT1B_1.1 6.124,31.701 11.348,31.701 12.209,30.839
OUT1B_2: OUT1B_2.1 U2.21 | length 13.4
  Top Layer w0.3: U2.21 58.762,27.104
  Top Layer w0.75: 58.762,27.104 59.905,28.248 59.905,33.821 63.123,37.039 OUT1B_2.1
OUT2A_1: OUT2A_1.1 U1.26 | length 10.1
  Top Layer w0.3: 10.13,26.653 U1.26
  Top Layer w0.75: OUT2A_1.1 2.924,25.999 3.578,26.653 10.13,26.653
OUT2A_2: OUT2A_2.1 U2.26 | length 11.4
  Top Layer w0.3: U2.26 54.435,29.413
  Top Layer w0.75: OUT2A_2.1 53.24,37.32 54.435,36.124 54.435,29.413
OUT2B_1: OUT2B_1.1 U1.1 | length 12.4
  Top Layer w0.3: 12.077,23.384 12.359,23.666 U1.1
  Top Layer w0.75: OUT2B_1.1 3.124,19.142 6.512,22.531 11.224,22.531 12.077,23.384
OUT2B_2: OUT2B_2.1 U2.1 | length 13.7
  Top Layer w0.3: 50.875,27.266 51.037,27.104 U2.1
  Top Layer w0.75: OUT2B_2.1 45.899,37.18 49.558,33.52 49.558,28.583 50.875,27.266
RESET_1: R31.1 U1.12 U3.27 | length 117
  Top Layer w0.3: U1.12 19.319,27.653 R31.1 19.434,28.129 19.705,28.401 24.448,28.401 25.062,27.787 25.062,18.499 28.775,14.786 69.079,14.786 72.127,17.834 72.127,32.85 74.26,34.982 90.55,34.982 91.221,34.311 v1(92.619,34.311) ; U3.27 v1(98.121,27.659)
  Bottom Layer w0.3: v1(92.619,34.311) 94.427,34.311 98.121,30.617 v1(98.121,27.659)
RESET_2: R32.1 U2.12 U3.31 | length 77.8
  Top Layer w0.3: R32.1@55.435,20.289 U2.12 ; R32.1 56.123,20.165 56.319,19.969 56.319,17.434 56.702,17.051 67.523,17.051 69.945,19.473 69.945,34.384 72.829,37.268 v1@92.467,37.268 ; U3.31 v1(103.201,27.659)
  Bottom Layer w0.3: v1(92.543,37.26) 97.018,37.26 103.201,31.077 v1(103.201,27.659)
SLEEP_1: R21.1 U1.14 U3.28 | length 122.1
  Top Layer w0.3: U1.14 17.4,28.653 17.855,29.107 17.855,29.991 18.353,30.489 R21.1 19.445,31.19 19.715,31.46 24.319,31.46 25.817,29.961 25.817,18.828 29.336,15.31 68.81,15.31 71.618,18.118 71.618,33.287 73.893,35.562 90.821,35.562 91.31,35.072 v1(91.839,35.072) ; U3.28 v1(99.391,27.695)
  Bottom Layer w0.3: v1(91.839,35.072) 94.995,35.072 99.391,30.676 v1(99.391,27.695)
SLEEP_2: R22.1 U2.14 U3.16 | length 55.9
  Top Layer w0.3: U2.14 56.435,22.059 56.721,21.773 57.935,21.773 58.386,21.321 R22.1 67.654,20.156 69.327,21.829 69.327,34.667 72.475,37.815 88.393,37.815 89.627,39.05 U3.16
STEP_1: R15.1 U1.16 U3.29 | length 135.6
  Top Layer w0.3: U1.16 14.859,30.898 15.321,31.36 R15.1 14.613,33.139 14.428,33.324 14.428,36.121 15.111,36.804 23.932,36.804 26.573,34.164 26.573,19.075 29.734,15.914 68.396,15.914 71.072,18.591 71.072,33.688 73.461,36.077 91.156,36.077 91.495,35.738 v1(92.562,35.738) ; U3.29 v1(100.661,27.614)
  Bottom Layer w0.3: v1(92.562,35.738) 95.94,35.738 100.661,31.017 v1(100.661,27.614)
STEP_2: R17.1 U2.16 U3.12 | length 55.9
  Top Layer w0.3: U2.16 61.122,24.604 R17.1 61.135,23.992 61.357,23.769 66.715,23.769 68.745,25.799 68.745,35.051 72.04,38.346 80.569,38.346 81.094,38.871 v1@86.15,38.871 ; v1@98.121,41.628 U3.12
  Bottom Layer w0.3: v1(86.15,38.899) 96.165,38.899 98.125,40.859 v1(98.125,41.514)
VIN: C3.2 C4.2 C5.2 C6.2 C9.2 C10.2 C35.2 C36.1 D4.K R41.2 U1.22 U1.28 U2.22 U2.28 U6.2 | length 164.2
  Top Layer w0.3: v1(11.218,24.601) v1@11.269,24.652 ; v1(15.465,18.927) C9.2 ; v1(46.039,23.764) C10.2 ; v1(51.815,28.206) 51.826,28.194 U2.28 ; U2.22 56.436,28.193 v1(57.847,28.193) ; R41.2 75.997,11.989 75.771,11.763 75.771,8.678 76.525,7.923 87.173,7.923 87.741,7.355 C36.1
  Top Layer w0.75: v1(10.309,21.222) C3.2 ; v1(10.342,33.179) C4.2 ; C5.2 v1(48.444,29.168) ; C6.2 v1(61.105,29.202)
  Top Layer w1: U6.2@86.097,12.832 91.166,12.832 D4.K 91.173,8.101 C35.2 91.178,6.179 90.22,5.221 C36.1@87.032,5.221
  Top Layer w1.27: D4.K v2@91.173,15.416
  Bottom Layer w0.3: v1(15.465,18.927) 15.465,22.446 15.539,22.521 ; 44.683,28.186 44.683,24.411 45.33,23.764 v1(46.039,23.764)
  Bottom Layer w0.75: v1(10.309,21.222) 12.376,21.222 12.577,21.423 12.577,22.521 ; v1(10.342,33.179) 10.8,33.179 11.359,32.62 v1(11.359,29.653) ; 48.415,28.186 48.444,28.215 v1(48.444,29.168) ; v1(61.105,29.202) 61.105,28.191 61.11,28.186
  Bottom Layer w1.27: v1@11.34,29.501 11.34,23.758 12.577,22.521 15.539,22.521 31.847,22.521 37.512,28.186 44.683,28.186 48.415,28.186 61.11,28.186 87.197,28.186 91.173,24.21 v2@91.173,15.485
  other v2: 91.18,10.349 93.538,10.739 93.537,11.743 93.498,12.915 93.486,13.927 93.486,14.931 91.16,15.316
pads on no net: J6. J6.10 U1.7 U1.20 U1.25 U2.7 U2.20 U2.25 U3.4 U3.5 U3.6 U3.7 U3.14 U3.17 U3.18 U3.19 U3.20 U3.21 U3.22 U3.32 U3.33 U5.4

## Polygon pours and split planes (outlines as drawn)
GND on Top Layer "Top-No Net" (hatched 90Degree grid 0.508 track 0.6, remove dead copper, pour order 0): 0,50 12,50 12,40 72,40 72,50 97,50 97,45 120,45 120,0 0,0 0,50
GND on Bottom Layer "Top-No Net" (hatched 90Degree grid 0.508 track 0.6, remove dead copper, pour order 2): 0,50 12,50 12,40 72,40 72,50 97,50 97,45 120,45 120,0 0,0 0,50

## Keep-outs
Keep-Out Layer:
  the board outline again, w0.254

## Other copper
Top Layer:
  region net VIN: 94.349,16.09 90.513,16.09 90.513,9.524 94.349,9.524
  region net VIN: 53.555,27.773 53.555,28.645 51.488,28.645 51.488,27.773
  region net VIN: 58.178,27.774 58.178,28.646 56.421,28.646 56.421,27.774
  rectangle net VIN: 10.836,28.535 11.708,30.05
  rectangle net VIN: 10.837,24.193 11.709,25.769
  pour cut-out: 119.992,44.992 112.828,44.993 112.828,23.989 119.975,23.983 119.975,44.975
Bottom Layer:
  region net VIN: 94.357,16.085 90.522,16.085 90.522,9.519 94.357,9.519
  pour cut-out: 120,45 112.631,45.001 112.631,23.931 119.984,23.924 119.984,44.984

## Silkscreen, mask and mechanical layers (free items; w line width, h text height)
Top Overlay:
  lines w0.152: 0.276,9.795 1.307,9.795 ; 0.276,12.054 1.308,12.054 ; 12.034,1.053 12.034,2.084 ; 33.316,1.188 33.316,2.22 ; 95.629,5.047 95.629,6.079 ; 105.446,19.703 105.446,20.734 ; 107.766,19.725 107.766,20.757 ; 110.138,19.694 110.138,20.726 ; 118.684,10.342 119.715,10.342 ; 118.684,12.6 119.716,12.6 ; 0.258,7.014 1.321,7.014 1.321,15.324 0.258,15.324 0.258,7.014 ; 10.032,1.016 14.1,1.016 14.1,2.079 10.032,2.079 10.032,1.016 ; 31.313,1.152 31.313,2.215 35.381,2.215 35.381,1.152 31.313,1.152 ; 91.715,5.034 91.715,6.097 99.382,6.097 99.382,5.034 91.715,5.034 ; 102.505,19.694 113.192,19.694 113.192,20.756 102.505,20.756 102.505,19.694 ; 118.666,7.561 118.666,15.871 119.729,15.871 119.729,7.561 118.666,7.561
  text "GND" at 103.094,19.761 h0.64
  text "RX" at 105.891,19.731 h0.64
  text "TX" at 108.334,19.731 h0.64
  text "3.3V" at 110.4,19.74 h0.64
  text "RESET" at 98.323,19.565 h0.64
  text "Wireless Stepper  / Motor Controller" at 23.887,14.521 h1.52
  text "Limit" at 119.676,12.897 h0.64 r90
  text "Limit" at 1.268,12.351 h0.64 r90
  text "GND" at 119.676,10.496 h0.64 r90
  text "GND" at 1.268,9.949 h0.64 r90
  text "3.3V" at 119.656,7.661 h0.64 r90
  text "3.3V" at 1.248,7.115 h0.64 r90
  text "GND" at 92.578,5.11 h0.64
  text "VIN+" at 96.399,5.087 h0.64
  text "M+" at 31.668,1.231 h0.64
  text "M-" at 33.709,1.204 h0.64
  text "M+" at 10.386,1.095 h0.64
  text "M-" at 12.428,1.068 h0.64
  text "PWR_ON" at 69.197,0.856 h0.64

## Dimensions
0,0 to 120,0 on Top Overlay
0,50 to 0,0 on Top Overlay

## Text inside footprints (layer, text, board x,y; h text height)
U3: Mechanical 16 "ANTENNA" at 115.831,40.605 h2.76 r270